# Altium PCB PCB1.PcbDoc (part 4 of 4)
Units mil, origin at the board's own origin, x right, y up, seen from the top; angles counter-clockwise.
Board outline 6796.85 x 4400 mil, 4 copper layers (Top Layer, Layer 1, Layer 2, Bottom Layer), stack 23.756 mil thick; 175 components, 152 nets, 720 pads, 183 vias.
Unrouted connection lines stored in the file: 10.
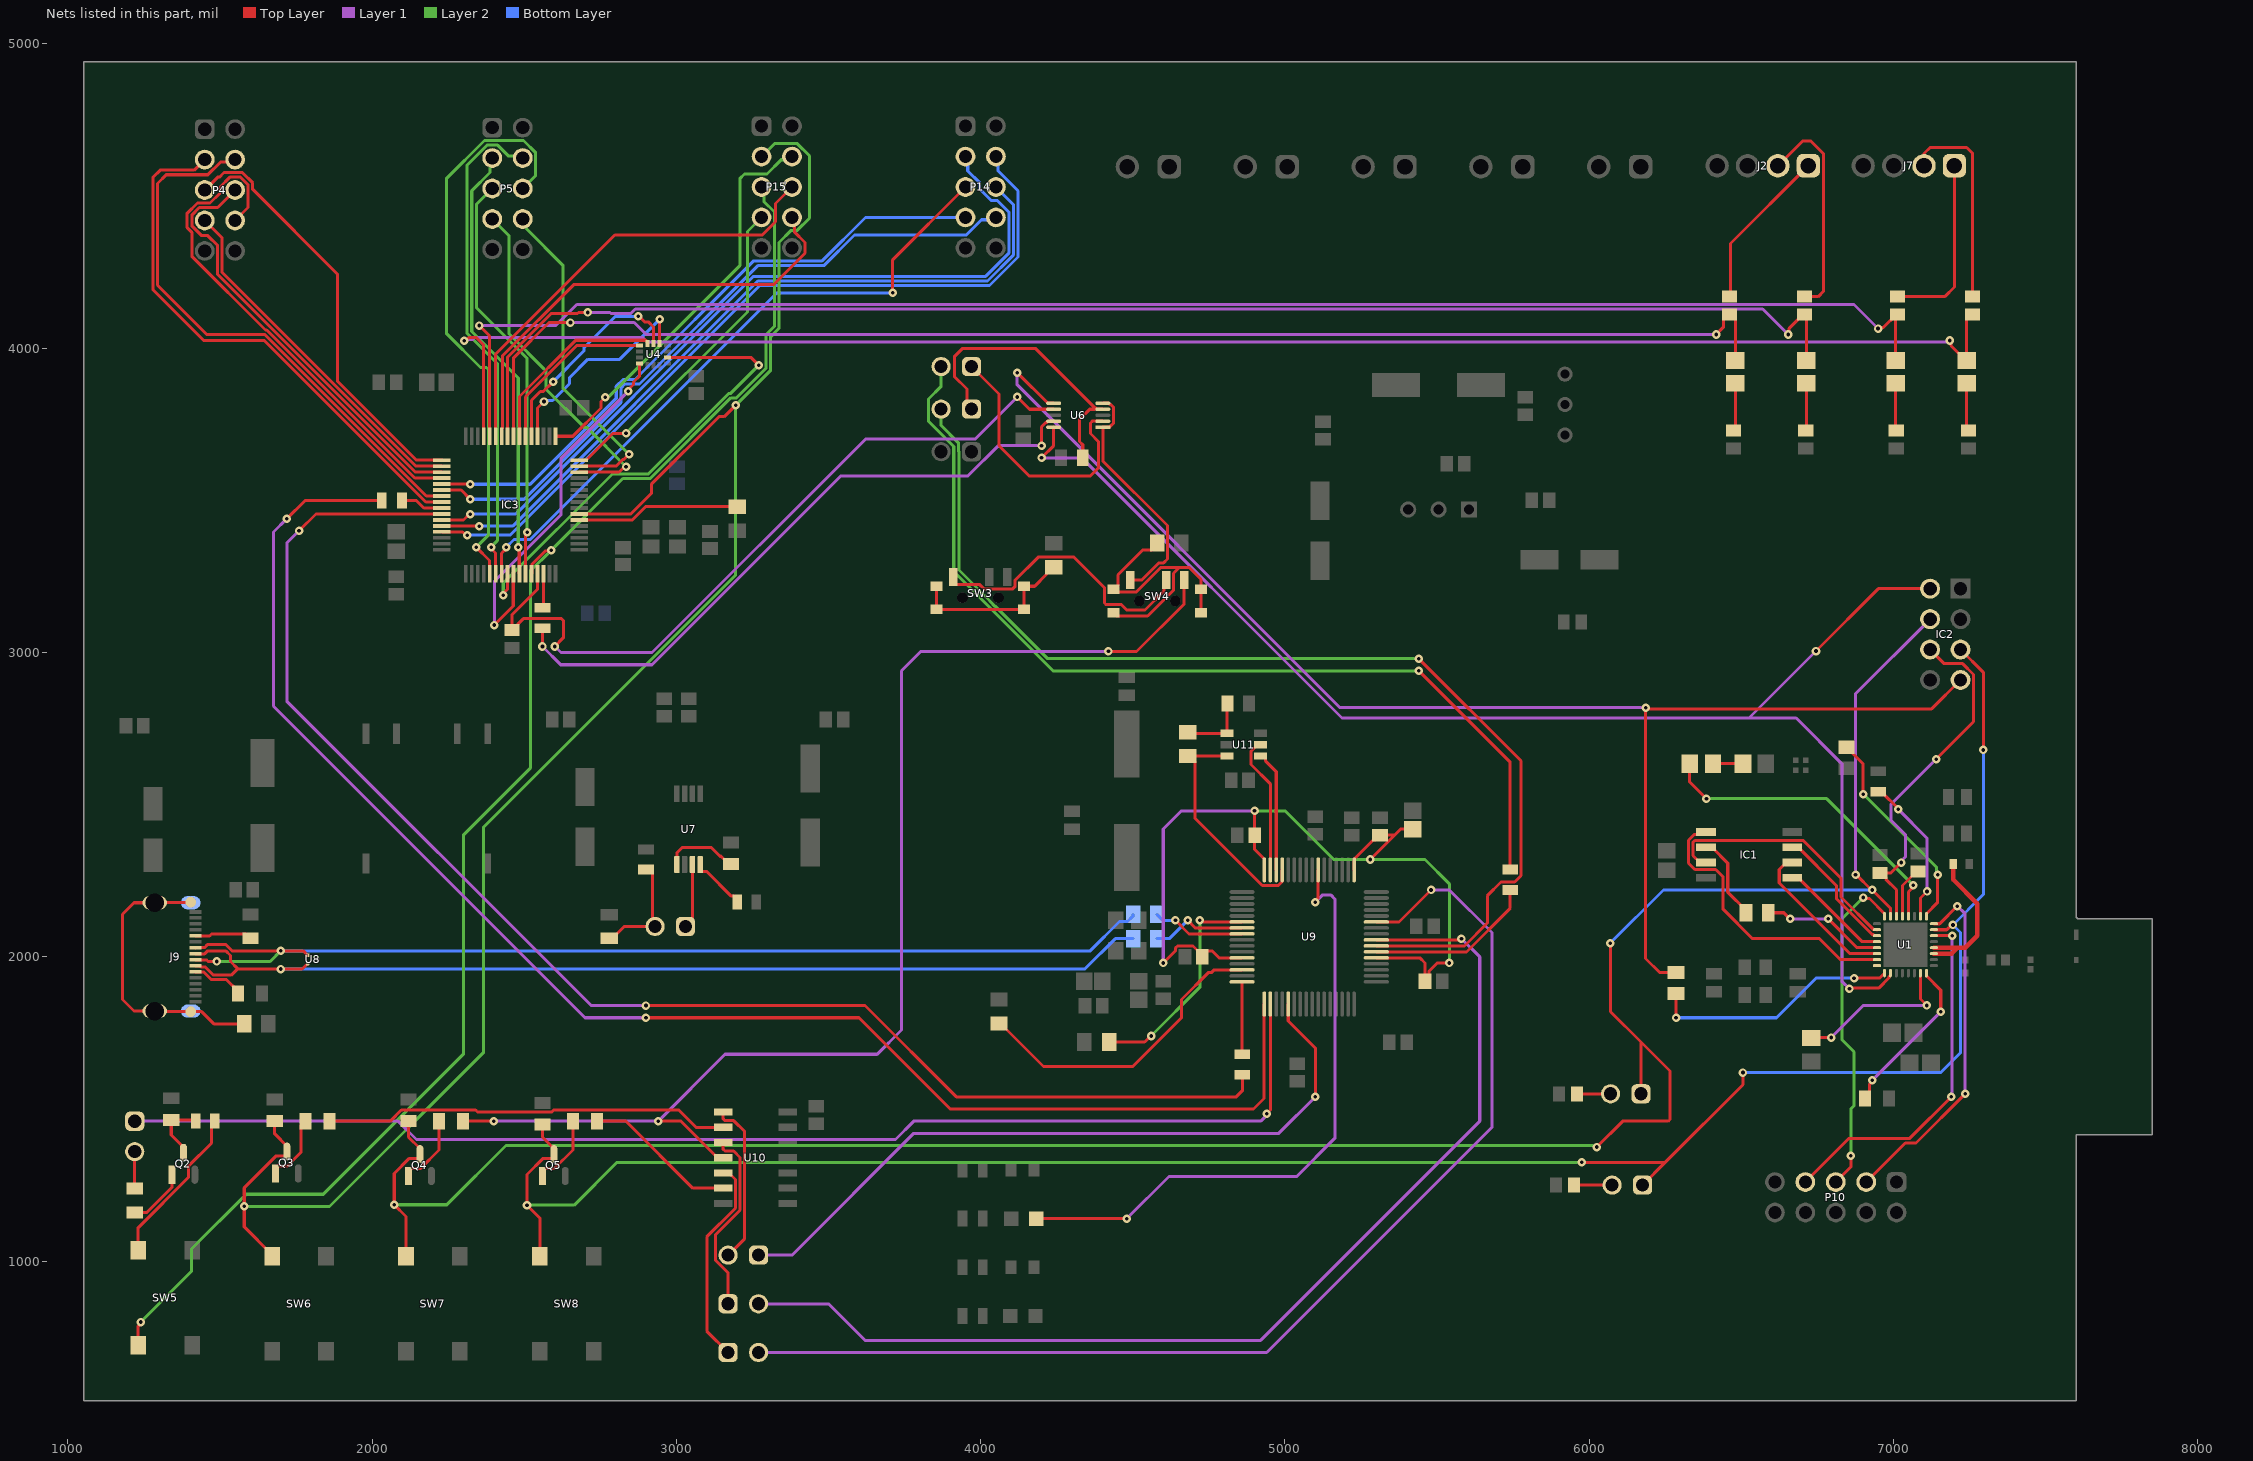
[diagram p5: the nets of this part, all layers, seen from the top]

## Via types
v1: diameter 28, hole 12, Top Layer to Bottom Layer, 170 vias
v2: diameter 19.68, hole 7.87, Top Layer to Bottom Layer, 9 vias
v3: diameter 240, hole 130, Top Layer to Bottom Layer, 4 vias

## Nets (pads, with @x,y where several pads share a name; then routed paths per layer and width w, separated by ;. In a path a pad name is that pad's centre, name@x,y a point inside that pad or via, vN(x,y) a via of type N, cw(c..) or ccw(c..) an arc to the next point about the centre after c; other vN are vias at no path point) (continued)
NetDS2_2: DS2.2 U9.55 | length 2066.2
  Top Layer w10: DS2.2@4182.68,1140 v1(4480,1140) ; v1(5100,2180) 5100,2184.87 5109.13,2194 U9.55@5109.13,2286.06
  Layer 1 w10: v1(4480,1140) 4618.62,1278.62 5038.62,1278.62 5164,1404 5164,2189.94 5149.94,2204 5124,2204 v1(5100,2180)
NetIC1_1: IC1.1 U1.20 | length 365.8
  Top Layer w10: IC1.1@6666.73,2260 6686.42,2260 6896.57,2049.84 U1.20@6945.5,2049.84
NetIC1_2: IC1.2 U1.22 | length 513.7
  Top Layer w10: IC1.2@6666.73,2310 6647.05,2310 6624.25,2287.2 6624.25,2243.06 6856.84,2010.47 U1.22@6945.5,2010.47
NetIC1_3: IC1.3 U1.19 | length 415.6
  Top Layer w10: IC1.3@6666.73,2360 6686.42,2360 6812.33,2234.08 6812.33,2190.89 6928.93,2074.29 6932.03,2074.29 U1.19@6936.72,2069.61
NetIC1_5: IC1.5 U1.23 | length 956.9
  Top Layer w10: IC1.5@6383.27,2410 6375.47,2402.2 6344.84,2402.2 6325.79,2383.15 6325.79,2308.06 6346.65,2287.2 6415.48,2287.2 6440.04,2262.65 6440.04,2156.61 6536.65,2060 6756.21,2060 6825.42,1990.79 U1.23@6945.5,1990.79
NetIC1_6: IC1.6 R2.1 | length 281.1
  Top Layer w10: IC1.6@6383.27,2360 6402.95,2360 6455.04,2307.91 6455.04,2212.83 6515,2152.87 R2.1@6515,2145
NetIC1_7: IC1.7 U1.18 | length 861
  Top Layer w10: IC1.7@6383.27,2310 6363.58,2310 6340.79,2332.79 6340.79,2376.94 6346.65,2382.79 6703.35,2382.79 6827.33,2258.81 6827.33,2197.1 6935.14,2089.29 6945.42,2089.29 U1.18@6945.5,2089.21
NetIC2_3: IC2.3 P2.1 Q5.3 R60.1 SW8.3 U1.7 | length 7043.9
  Top Layer w10: SW8.3@2551.42,1016.5 2551.42,1141.99 v1(2509.12,1184.28) 2509.12,1284.65 2562.52,1338.04 2591.51,1338.04 2597.4,1343.93 Q5.3@2597.4,1351.67 2597.4,1370.3 2560,1407.7 R60.1@2560,1449.13 ; v1(5975,1325) 6250,1325 ; P2.1@6175,1249.98 6250.01,1324.99 ; v1(6505,1620) 6505,1579.98 6250.01,1324.99 ; U1.7@7132.5,2089.21 7174.34,2089.21 7190.13,2105 v1(7195,2105) ; IC2.3@7220,3010 7295,2935 v1(7295,2680)
  Layer 2 w10: v1(2509.12,1184.28) 2664.28,1184.28 2805,1325 v1(5975,1325)
  Bottom Layer w10: v1(6505,1620) 7155,1620 7220,1685 7220,2080 v1(7195,2105) 7295,2205 v1(7295,2680)
NetIC2_4: IC2.4 R1.1 U6.6 | length 4723.6
  Top Layer w10: v1(4120,3920) 4120.39,3920 4221.02,3819.37 U6.6@4240,3819.37 ; v1@6185,2815 7125,2815 IC2.4@7220,2910 ; v1(6185,2819) 6185,1995 6231.1,1948.9 R1.1@6285,1948.9
  Layer 1 w10: v1(4120,3920) 4120,3880 5181,2819 v1(6185,2819)
NetIC2_5: IC2.5 U1.26 U6.10 | length 4847
  Top Layer w10: v1(4200,3640) 4240,3680 U6.10@4240,3740.63 ; v1(6745,3005) 6950,3210 IC2.5@7120,3210 ; v1(6855,1895) 6857.22,1897.22 6950.78,1897.22 6985.02,1931.46 6985.02,1935.02 6989.79,1939.79 U1.26@6989.79,1946.5
  Layer 1 w10: v1(4200,3640) 4332.44,3640 5187.44,2785 6525,2785 ; v1(6745,3005) 6525,2785 ; v1(6855,1895) 6830,1920 6830,2635 6680,2785 6525,2785
NetIC2_6: IC2.6 P3.1 Q4.3 R57.1 SW7.3 U1.15 | length 7729.7
  Top Layer w10: SW7.3@2111.42,1016.5 2111.42,1146.79 v1(2072.8,1185.4) 2072.8,1288.32 2122.52,1338.04 2151.51,1338.04 2157.4,1343.93 Q4.3@2157.4,1351.67 2157.4,1370.3 2120,1407.7 R57.1@2120,1460 ; v1(6025,1375) 6110,1460 6259.14,1460 6265,1465.86 6265,1625 6170,1720 ; v1(6069.14,2045.31) 6070,2044.44 6070,1820 6170,1720 ; P3.1@6170,1550 6170,1720 ; v1(6875,2270) 6877.5,2270 6927.5,2220 v1(6930,2220) 6989.79,2160.21 U1.15@6989.79,2133.5
  Layer 1 w10: v1(6875,2270) 6875,2865 IC2.6@7120,3110
  Layer 2 w10: v1(2072.8,1185.4) 2245.4,1185.4 2440,1380 v1@6025,1380
  Bottom Layer w10: v1(6069.14,2045.31) 6243.83,2220 v1(6930,2220)
NetIC2_7: IC2.7 R4.1 U1.14 | length 1179.3
  Top Layer w10: R4.1@6955,2275 6990,2275 v1(7025,2310) ; R4.1@6959.92,2275 6974.61,2260.31 6974.61,2255.39 7009.47,2220.53 U1.14@7009.47,2133.5 ; IC2.7@7120,3010 7166.46,2963.54 7226.95,2963.54 7262.78,2927.72 7262.78,2772.78 v1(7140,2650)
  Layer 1 w10: v1(7025,2310) 7025,2314.87 7039,2328.87 7039,2401.59 6991,2449.59 6991,2501 v1(7140,2650)
NetIC3_6: IC3.6 R62.2 | length 537.1
  Top Layer w10: IC3.6@2680.91,3435.79 2855.08,3435.79 2898.66,3479.37 R62.2@3200,3479.37
NetIC3_7: IC3.7 P15.3 Q3.3 R49.1 SW6.3 | length 5842
  Top Layer w10: SW6.3@1671.42,1016.5 1671.42,1021.42 1580,1112.84 v1(1580,1180) 1580,1241.26 1685.11,1346.37 1714.11,1346.37 1720,1352.27 Q3.3@1720,1360 1720,1378.63 1680,1418.63 R49.1@1680,1460 ; IC3.7@2680.91,3455.47 2850.12,3455.47 2917.7,3523.05 2917.7,3553.05 3139.76,3775.11 3157.08,3775.11 v1(3194.92,3812.96)
  Layer 2 w10: v1(1580,1180) 1860,1180 2366.52,1686.52 2366.52,2426.52 3194.92,3254.92 v1(3194.92,3812.96) 3309.69,3927.73 3309.69,4038.03 3337.48,4065.83 3337.48,4347.56 3377.42,4387.5 3397.58,4387.5 3437.48,4427.4 3437.48,4632.6 3397.6,4672.48 3322.48,4672.48 P15.3@3280,4630
NetIC3_14: IC3.14 P5.7 | length 1162.3
  Top Layer w10: IC3.14@2680.91,3593.27 2812.05,3593.27 2829.77,3610.99 v1(2834.65,3610.99)
  Layer 2 w10: P5.7@2395,4425 2449.92,4370.08 2449.92,4047.67 2571,3926.59 2571,3866.01 2696.79,3740.22 2705.42,3740.22 v1(2834.65,3610.99)
NetIC3_15: IC3.15 P5.8 | length 1097.8
  Top Layer w10: IC3.15@2680.91,3612.95 2802.66,3612.95 2824.7,3634.99 2827.91,3634.99 v1(2844.49,3651.57)
  Layer 2 w10: P5.8@2495,4425 2505.52,4414.48 2505.52,4394.09 2627.95,4271.65 2627.95,3868.11 v1(2844.49,3651.57)
NetIC3_16: IC3.16 P15.7 | length 1084.1
  Top Layer w10: IC3.16@2680.91,3632.64 2704.04,3632.64 2791.87,3720.47 v1(2834.65,3720.47)
  Layer 2 w10: v1(2834.65,3720.47) 3233.5,4119.33 3233.5,4383.5 P15.7@3280,4430
NetIC3_17: IC3.17 P15.4 | length 1338
  Top Layer w10: IC3.17@2602.64,3710.91 2659.85,3710.91 2752.46,3803.52 2752.46,3825.3 v1(2765.75,3838.58)
  Layer 2 w10: v1(2765.75,3838.58) 2769.19,3842.03 2779.03,3842.03 3208.66,4271.65 3208.66,4557.09 3224.06,4572.48 3297.6,4572.48 3344.6,4619.48 3369.48,4619.48 P15.4@3380,4630
NetIC3_20: IC3.20 U4.12 | length 705.7
  Top Layer w10: IC3.20@2543.58,3710.91 2543.58,3803.58 v1(2565,3825) ; U4.12@2944.69,4015.93 2944.69,4094.69 v1(2945,4095)
  Bottom Layer w10: v1(2565,3825) 2568.44,3828.44 2593.44,3828.44 2648.64,3883.64 2648.64,3903.64 2708.83,3963.83 2813.83,3963.83 v1(2945,4095)
NetIC3_21: IC3.21 U4.13 | length 707.9
  Top Layer w10: IC3.21@2523.9,3710.91 2523.9,3828.9 2552.73,3857.73 2562.73,3857.73 v1(2595,3890) ; v1(2875,4105) 2877.57,4105 2896.79,4085.78 2909.22,4085.78 2925,4070 U4.13@2925,4015.93
  Bottom Layer w10: v1(2595,3890) 2696.72,3991.72 2696.72,4001.72 2800,4105 v1(2875,4105)
NetIC3_22: IC3.22 U4.1 | length 574.5
  Top Layer w10: IC3.22@2504.21,3710.91 2504.21,3840.32 2673.42,4009.53 U4.1@2879.23,4009.53
NetIC3_23: IC3.23 U4.14 | length 635.1
  Top Layer w10: IC3.23@2484.53,3710.91 2484.53,3841.85 2669.09,4026.42 2899.25,4026.42 2905.32,4020.36 U4.14@2905.32,4015.93
NetIC3_24: IC3.24 R16.1 R18.2 | length 4531
  Top Layer w10: IC3.24@2464.84,3710.91 2464.84,3969.22 2465.77,3969.22 2581.2,4084.65 v1(2651.95,4084.65) ; v1(6417.32,4045.28) 6440.71,4068.66 6440.71,4095.79 6455.39,4110.47 R16.1@6460.32,4110.47 6480,4110.47 R18.2@6480,3960
  Layer 1 w10: v1(2651.95,4084.65) 2861.41,4084.65 2900.78,4045.28 v1(6417.32,4045.28)
NetIC3_25: IC3.25 R17.1 R19.2 | length 4818.5
  Top Layer w10: IC3.25@2445.16,3710.91 2445.16,3970.75 2588.58,4114.17 2675.14,4114.17 2678.66,4117.7 v1(2709.14,4117.7) ; v1(6653.54,4045.28) 6656.99,4048.72 6656.99,4065.61 6701.85,4110.47 R17.1@6706.77,4110.47 6713.33,4110.47 R19.2@6713.33,3960
  Layer 1 w10: v1(2709.14,4117.7) 2782.08,4117.7 2785.6,4114.17 2850.23,4114.17 2865.06,4129 6569.82,4129 v1(6653.54,4045.28)
NetIC3_26: IC3.26 P15.8 | length 1534.5
  Top Layer w10: IC3.26@2425.47,3710.91 2425.47,3734.04 2429.25,3737.82 2429.25,3976.06 2662.33,4209.13 3319.21,4209.13 3422.48,4312.4 3422.48,4347.6 3387.56,4382.52 3387.56,4422.44 P15.8@3380,4430
NetIC3_27: IC3.27 P15.6 | length 1506.7
  Top Layer w10: IC3.27@2405.79,3710.91 2405.79,3980.59 2797.68,4372.48 3282.56,4372.48 3326.02,4415.94 3326.02,4476.02 P15.6@3380,4530
NetIC3_28: IC3.28 R22.1 R24.2 | length 5276
  Top Layer w10: v1(2352.36,4074.8) 2386.1,4041.06 IC3.28@2386.1,3710.91 ; v1(6948.82,4064.96) 6952.26,4068.4 6966.24,4068.4 7008.31,4110.47 R22.1@7013.23,4110.47 7006.67,4110.47 R24.2@7006.67,3960
  Layer 1 w10: v1(2352.36,4074.8) 2603.85,4074.8 2673.05,4144 6869.78,4144 v1(6948.82,4064.96)
NetIC3_29: IC3.29 R23.1 R25.2 | length 5533.9
  Top Layer w10: v1(2302.39,4024.83) 2307.26,4024.83 2317.86,4035.43 2342.52,4035.43 2366.42,4011.53 IC3.29@2366.42,3710.91 ; v1(7185.04,4025.59) 7188.48,4022.15 7188.48,4008.56 7237.05,3960 R25.2@7240,3960 7240,4110.47 R23.1@7259.68,4110.47
  Layer 1 w10: v1(2302.39,4024.83) 2305.83,4028.27 2329.22,4028.27 2336.39,4035.43 2889.41,4035.43 2903.57,4021.28 7175.85,4021.28 7180.17,4025.59 v1(7185.04,4025.59)
NetIC3_33: IC3.33 P4.5 | length 1413.2
  Top Layer w10: P4.5@1450,4520 1492.48,4562.48 1498.4,4562.48 1513.4,4577.48 1573.81,4577.48 1607.48,4543.81 1607.48,4522.6 1886.33,4243.75 1886.33,3891.23 2144.32,3633.23 2228.5,3633.23 IC3.33@2229.09,3632.64
NetIC3_34: IC3.34 P4.7 | length 1180
  Top Layer w10: P4.7@1450,4420 1507.52,4362.48 1507.52,4248.83 2143.39,3612.95 IC3.34@2229.09,3612.95
NetIC3_35: IC3.35 P4.6 | length 1424.2
  Top Layer w10: P4.6@1550,4520 1492.48,4462.48 1432.4,4462.48 1407.52,4437.6 1407.52,4402.4 1439.94,4369.98 1460.1,4369.98 1492.52,4337.56 1492.52,4242.61 2141.86,3593.27 IC3.35@2229.09,3593.27
NetIC3_36: IC3.36 P4.8 | length 1677.5
  Top Layer w10: P4.8@1550,4420 1592.48,4462.48 1592.48,4537.6 1567.6,4562.48 1532.4,4562.48 1499.98,4530.06 1499.98,4509.9 1467.56,4477.48 1426.19,4477.48 1392.52,4443.81 1392.52,4396.19 1407.52,4381.19 1407.52,4302.4 1649.65,4060.28 1653.64,4060.28 2140.34,3573.58 IC3.36@2229.09,3573.58
NetIC3_37: IC3.37 P14.7 | length 2107.2
  Top Layer w10: IC3.37@2229.09,3553.9 2229.47,3553.52 2322.46,3553.52 v1(2322.83,3553.15)
  Bottom Layer w10: v1(2322.83,3553.15) 2519.68,3553.15 2802.36,3835.83 2802.36,3874.79 2825.21,3897.64 2864.17,3897.64 3254.06,4287.52 3478.91,4287.52 3621.39,4430 P14.7@3950,4430
NetIC3_38: IC3.38 P14.8 | length 2244.7
  Top Layer w10: IC3.38@2229.09,3534.21 2292.56,3534.21 v1(2322.83,3503.94)
  Bottom Layer w10: v1(2322.83,3503.94) 2500,3503.94 2817.36,3821.3 2817.36,3868.58 2831.42,3882.64 2878.7,3882.64 3267.72,4271.65 3484.25,4271.65 3585.08,4372.48 3952.56,4372.48 4002.52,4422.44 4042.44,4422.44 P14.8@4050,4430
NetIC3_39: IC3.39 P4.4 | length 1843.6
  Top Layer w10: P4.4@1550,4620 1542.44,4612.44 1502.52,4612.44 1460.35,4570.28 1323.42,4570.28 1294.53,4541.39 1294.53,4207.44 1456.69,4045.28 1647.43,4045.28 2178.18,3514.53 IC3.39@2229.09,3514.53
NetIC3_40: IC3.40 P4.3 | length 1801.8
  Top Layer w10: P4.3@1450,4620 1415.28,4585.28 1303.73,4585.28 1279.53,4561.07 1279.53,4192.91 1446.85,4025.59 1645.9,4025.59 2176.65,3494.84 IC3.40@2229.09,3494.84
NetIC3_41: IC3.41 R29.1 | length 140.9
  Top Layer w10: R29.1@2098.5,3500 2145.25,3500 2170.09,3475.16 IC3.41@2229.09,3475.16
NetIC3_42: IC3.42 R48.2 | length 4808.4
  Top Layer w10: v1(1760,3400) 1815.47,3455.47 IC3.42@2229.09,3455.47 ; v1(2900,1840) 3620,1840 3920,1540 4840,1540 4860,1560 R48.2@4860,1613
  Layer 1 w10: v1(1760,3400) 1720,3360 1720,2840 2720,1840 v1(2900,1840)
NetIC3_43: IC3.43 P14.3 | length 2614.9
  Top Layer w10: IC3.43@2229.09,3435.79 2300.76,3435.79 2319.7,3454.72 v1(2322.83,3454.72)
  Bottom Layer w10: v1(2322.83,3454.72) 2472,3454.72 3253.54,4236.27 4016.34,4236.27 4092.48,4312.4 4092.48,4447.6 4054.55,4485.53 4034.39,4485.53 3996.46,4523.46 3996.46,4543.62 3957.56,4582.52 3957.56,4622.44 P14.3@3950,4630
NetIC3_44: IC3.44 P14.6 | length 2495.3
  Top Layer w10: IC3.44@2229.09,3416.1 2229.47,3415.73 2351.99,3415.73 v1(2352.36,3415.35)
  Bottom Layer w10: v1(2352.36,3415.35) 2461.8,3415.35 3267.72,4221.27 4022.56,4221.27 4107.48,4306.19 4107.48,4472.52 P14.6@4050,4530
NetIC3_45: IC3.45 P14.4 | length 2636.5
  Top Layer w10: IC3.45@2229.09,3396.42 2297.53,3396.42 2308.12,3385.83 v1(2312.99,3385.83)
  Bottom Layer w10: v1(2312.99,3385.83) 2453.49,3385.83 3273.93,4206.27 4028.77,4206.27 4122.48,4299.98 4122.48,4517.6 4057.56,4582.52 4057.56,4622.44 P14.4@4050,4630
NetIC3_53: IC3.53 P5.6 | length 1898
  Top Layer w10: v1(2342.52,3346.46) 2386.1,3302.87 IC3.53@2386.1,3259.09
  Layer 2 w10: v1(2342.52,3346.46) 2381.89,3385.83 2381.89,3931.15 2376.03,3937.01 2356.26,3937.01 2244.09,4049.18 2244.09,4557.09 2369.49,4682.48 2497.6,4682.48 2537.48,4642.6 2537.48,4567.48 P5.6@2495,4525
NetIC3_54: IC3.54 P5.4 | length 1625.4
  Top Layer w10: v1(2391.73,3346.46) 2391.73,3341.59 2405.79,3327.53 IC3.54@2405.79,3259.09
  Layer 2 w10: v1(2391.73,3346.46) 2391.73,3348.1 2411.42,3367.78 2411.42,3949.74 2312.52,4048.63 2312.52,4602.6 2377.4,4667.48 2412.6,4667.48 2447.52,4632.56 2487.44,4632.56 P5.4@2495,4625
NetIC3_55: IC3.55 P14.5 | length 2156.5
  Top Layer w10: IC3.55@2425.47,3259.09 2425.47,3326.11 2440.94,3341.59 v1(2440.94,3346.46) ; v1(3710.63,4182.27) 3710.63,4290.63 P14.5@3950,4530
  Bottom Layer w10: v1(2440.94,3346.46) 2466.16,3371.67 2519.78,3371.67 3330.38,4182.27 v1(3710.63,4182.27)
NetIC3_56: IC3.56 U4.9 | length 1562.1
  Top Layer w10: v1(2431.1,3188.98) 2431.1,3193.85 2445.16,3207.9 IC3.56@2445.16,3259.09 ; U4.9@2970.77,3970.16 3244.41,3970.16 v1(3270.69,3943.88)
  Layer 2 w10: v1(2431.1,3188.98) 2431.1,3228.35 2789.75,3586.99 2907.86,3586.99 3172.82,3851.96 3178.76,3851.96 v1(3270.69,3943.88)
NetIC3_57: IC3.57 U4.4 | length 1252.5
  Top Layer w10: v1(2401.57,3090.55) 2463.98,3152.96 2463.98,3258.23 IC3.57@2464.84,3259.09 ; v1(2841.36,3858.64) 2841.36,3863.51 2859.04,3881.18 2859.04,3889.04 2879.23,3909.23 U4.4@2879.23,3950.47
  Layer 1 w10: v1(2401.57,3090.55) 2401.57,3233.78 2621.47,3453.67 2621.47,3638.74 v1(2841.36,3858.64)
NetIC3_58: IC3.58 P5.3 | length 1458.9
  Top Layer w10: v1(2480.32,3346.46) 2483.62,3343.15 2483.62,3260 IC3.58@2484.53,3259.09
  Layer 2 w10: P5.3@2395,4625 2387.44,4617.44 2387.44,4577.52 2327.52,4517.6 2327.52,4054.85 2480.32,3902.05 v1(2480.32,3346.46)
NetIC3_59: IC3.59 P5.5 | length 1359.3
  Top Layer w10: IC3.59@2504.21,3259.09 2504.32,3259.2 2504.32,3385.27 2509.84,3390.8 v1(2509.84,3395.67)
  Layer 2 w10: P5.5@2395,4525 2342.52,4472.52 2342.52,4133.86 2509.84,3966.54 v1(2509.84,3395.67)
NetIC3_60: IC3.60 P15.5 SW5.4 | length 5016.7
  Top Layer w10: SW5.4@1231.42,723.5 1231.42,786.55 1240,795.13 v1(1240,800) ; IC3.60@2523.9,3259.09 2524.8,3260 2524.8,3289.4 2568.57,3333.17 2585.14,3333.17 v1(2588.58,3336.61)
  Layer 2 w10: v1(1240,800) 1406.75,966.75 1406.75,1040.69 1586.06,1220 1840,1220 2300,1680 2300,2400 2520,2620 2520,3268.03 v1(2588.58,3336.61) 2823.96,3571.99 2914.07,3571.99 3179.04,3836.96 3197.7,3836.96 3294.69,3933.94 3294.69,4044.25 3322.48,4072.04 3322.48,4447.6 3287.56,4482.52 3287.56,4522.44 P15.5@3280,4530
NetIC3_61: IC3.61 R30.1 U6.7 | length 2515.8
  Top Layer w10: IC3.61@2543.58,3259.09 2543.58,3207.85 2460,3124.27 R30.1@2460,3074.53 2497.02,3111.54 2622.6,3111.54 2628.46,3105.69 2628.46,3048.46 v1(2600,3020) ; v1(4120,3840) 4160.31,3799.69 U6.7@4240,3799.69
  Layer 1 w10: v1(2600,3020) 2601.01,3020 2621.01,3000 2920,3000 3621.5,3701.5 3981.5,3701.5 v1(4120,3840)
NetIC3_62: IC3.62 R28.1 | length 106.9
  Top Layer w10: R28.1@2560,3153.5 2563.27,3156.77 IC3.62@2563.27,3259.09
NetJ2_1: J2.1 R16.2 | length 540.2
  Top Layer w10: R16.2@6460.32,4169.53 6464,4169.53 6464,4344 J2.1@6720,4600
NetJ2_2: J2.2 R17.2 | length 722.3
  Top Layer w10: J2.2@6620,4600 6701,4681 6728,4681 6769,4640 6769,4186.53 6752,4169.53 R17.2@6706.77,4169.53
NetJ7_1: J7.1 R22.2 | length 598.5
  Top Layer w10: R22.2@7013.23,4169.53 7168,4169.53 7200,4201.53 J7.1@7200,4600
NetJ7_2: J7.2 R23.2 | length 687.4
  Top Layer w10: J7.2@7100,4600 7100,4640 7120,4660 7240,4660 7260,4640 7260,4169.53 R23.2@7259.68,4169.53
NetJ9_1: J9.1 J9.2 J9.3 J9.4 R47.1 | length 953.3
  Top Layer w10: J9.1@1404.02,2178.94 1286.89,2178.94 J9.3@1285.91,2177.95 1217.95,2177.95 1180,2140 1180,1860 1217.95,1822.05 J9.4@1285.91,1822.05 1286.89,1821.06 1403.03,1821.06 J9.2@1404.02,1820.08 1439.92,1820.08 1480,1780 R47.1@1580,1780
NetJ9_A5: J9.A5 R39.2 | length 188.5
  Top Layer w10: J9.A5@1419.76,2068.9 1466.47,2068.9 1472.57,2075 1586.26,2075 R39.2@1600,2061.26
NetJ9_A6: J9.A6 J9.B6 R52.1 U8.1 | length 3537.6
  Top Layer w10: J9.B6@1419.76,1990.16 1456.05,1990.16 1461.05,1985.16 1489.97,1985.16 v1(1490.05,1985.08) ; J9.A6@1419.76,2029.53 1420.67,2030.43 1449.22,2030.43 1458.79,2040 1520,2040 1540,2020 v1(1700,2020) 1773.59,2020 U8.1@1788.1,2005.48
  Layer 2 w10: v1(1490.05,1985.08) 1665.08,1985.08 v1(1700,2020)
  Bottom Layer w10: v1(1700,2020) 4360,2020 4456.46,2116.46 4482.64,2116.46 4501.26,2135.08 R52.1@4501.26,2140
NetJ9_A7: J9.A7 J9.B7 R51.1 U8.2 | length 3418.7
  Top Layer w10: J9.A7@1419.76,1970.47 1433.54,1970.47 1437.32,1966.69 1452.08,1966.69 1478.77,1940 1537.05,1940 1558.27,1961.22 ; J9.B7@1419.76,2009.84 1449.84,2009.84 1460,2020 1518.79,2020 1534.51,2004.28 1534.51,1984.98 1558.27,1961.22 ; U8.2@1788.1,1977.92 1770.18,1960 v1(1700,1960) 1559.49,1960 1558.27,1961.22
  Bottom Layer w10: v1(1700,1960) 4342.47,1960 4442.47,2060 R51.1@4501.26,2060
NetJ9_B5: J9.B5 R43.2 | length 173.6
  Top Layer w10: J9.B5@1419.76,1950.79 1420.67,1949.88 1447.67,1949.88 1472.56,1925 1521.89,1925 1560,1886.89 R43.2@1560,1880
NetL1_2: L1.2 U1.3 U1.4 | length 516.7
  Top Layer w10: L1.2@7196.71,2300.57 L1.2@7196.71,2305
  Top Layer w15: U1.3@7132.5,2010.47 7190.47,2010.47 7210.16,2030.16 ; U1.4@7132.5,2030.16 7210.16,2030.16 ; L1.2@7196.71,2305 7196.71,2253.29 7275,2175 7275,2070 7235.16,2030.16 7210.16,2030.16
NetP1_1: P1.1 U6.2 | length 877.3
  Top Layer w10: P1.1@3970,3940 4060,3850 4060,3680 4159,3581 4361,3581 4386.48,3606.48 4386.48,3693.92 4360.61,3719.8 4360.61,3754.46 4366.46,3760.32 U6.2@4401.48,3760.32
NetP1_2: P1.2 R54.2 | length 3164.1
  Top Layer w10: v1(5440,2940) 5740,2640 R54.2@5740,2287
  Layer 2 w10: P1.2@3870,3940 3870,3874.98 3828.5,3833.49 3828.5,3760.18 3911.5,3677.19 3911.5,3266.21 4237.7,2940 v1@5437.85,2940
NetP2_2: P2.2 R6.1 | length 125
  Top Layer w10: R6.1@5950,1250 P2.2@6075,1249.98
NetP3_2: P3.2 R7.1 | length 110.5
  Top Layer w10: R7.1@5959.53,1550 P3.2@6070,1550
NetP6_1: P6.1 R31.1 U6.4 | length 973.9
  Top Layer w10: P6.1@3970,3800 3955,3815 3955,3865.88 3913.5,3907.37 3913.5,3972.63 3940.88,4000 4179.43,4000 4376.21,3803.22 4378.74,3803.22 4382.28,3799.69 U6.4@4401.48,3799.69 ; R31.1@4335.43,3640 4335.43,3683.35 4325,3693.79 4325,3766.21 4358.47,3799.69 4376.21,3799.69
NetP6_2: P6.2 U9.39 | length 3661.6
  Top Layer w10: U9.39@5300.08,2036.06 5463.11,2036.06 5463.18,2036 5589.94,2036 5665,2111.06 5665,2200.77 5710.11,2245.88 5754.65,2245.88 5775.75,2266.98 5775.75,2644.25 v1(5440,2980)
  Layer 2 w10: P6.2@3870,3800 3870,3746.21 3926.5,3689.72 3926.5,3662.19 3928.5,3660.18 3928.5,3271.5 4030.4,3169.6 4030.4,3168.52 4046.63,3152.28 4047.72,3152.28 4220,2980 v1(5440,2980)
NetP8_1: P8.1 U9.18 | length 4147.9
  Top Layer w10: v1(4940,1484.87) 4951.65,1496.52 U9.18@4951.65,1845.12
  Layer 1 w10: P8.1@1220,1460 2085.81,1460 2145.81,1400 3720,1400 3780,1460 4920,1460 4940,1480 v1(4940,1484.87)
NetP8_2: P8.2 R46.1 | length 120.6
  Top Layer w10: R46.1@1220,1239.37 P8.2@1220,1360
NetP9_1: P9.1 U7.3 | length 212.9
  Top Layer w10: P9.1@3030,2100 3030,2105.82 3052.8,2128.61 U7.3@3052.8,2303.5
NetP9_2: P9.2 R37.1 R42.2 | length 371.6
  Top Layer w10: R42.2@2780,2061.61 2789.84,2061.61 2828.23,2100 P9.2@2930,2100 2921.57,2108.43 2921.57,2275.79 2909.84,2287.52 R37.1@2900,2287.52
NetP10_3: P10.3 U1.8 | length 1173.6
  Top Layer w10: P10.3@6910,1260 7038.54,1388.54 7073.54,1388.54 v1(7235,1550) ; U1.8@7132.5,2108.9 7151.53,2108.9 v1(7209.54,2166.91)
  Layer 1 w10: v1(7209.54,2166.91) 7235,2141.45 v1(7235,1550)
NetP10_5: P10.5 U1.16 | length 1105.3
  Top Layer w10: P10.5@6810,1260 6859.58,1309.57 v1(6859.58,1346.41) ; v1(6900,2195) 6903.44,2191.56 6920.75,2191.56 6970.1,2142.21 U1.16@6970.1,2133.5
  Layer 2 w10: v1(6859.58,1346.41) 6859.58,1499.9 6870,1510.32 6870,1688.13 6831,1727.13 6831,2126 v1(6900,2195)
NetP10_7: P10.7 U1.6 | length 1187.2
  Top Layer w10: P10.7@6710,1260 6853.54,1403.54 7053.54,1403.54 v1(7190,1540) ; U1.6@7132.5,2069.53 7132.58,2069.61 7192.27,2069.61 v1(7192.59,2069.93)
  Layer 1 w10: v1(7190,1540) 7191.29,1541.29 7191.29,2068.64 v1(7192.59,2069.93)
NetP11_1: P11.1 U9.21 | length 2387.5
  Top Layer w10: U9.21@5010.71,1845.12 5010.71,1789.29 5100,1700 v1(5100,1540)
  Layer 1 w10: P11.1@3270,1020 3380,1020 3780,1420 4980,1420 v1(5100,1540)
NetP11_2: P11.2 U10.1 | length 538.3
  Top Layer w10: U10.1@3153.7,1490 3153.7,1468.11 3160,1461.81 3188.35,1461.81 3224.21,1425.95 3224.21,1074.21 P11.2@3170,1020
NetP12_1: P12.1 U10.3 | length 620.5
  Top Layer w10: U10.3@3153.7,1390 3153.7,1367.67 3159.56,1361.81 3188.35,1361.81 3209.21,1340.95 3209.21,1167.83 3128.5,1087.13 3128.5,1002.81 3170,961.32 P12.1@3170,860
NetP12_2: P12.2 U9.40 | length 3624.5
  Top Layer w10: U9.40@5300.08,2055.75 5570.88,2055.75 5575.13,2060 v1(5580,2060)
  Layer 1 w10: P12.2@3270,860 3500,860 3620,740 4920,740 5640,1460 5640,2000 v1(5580,2060)
NetP13_1: P13.1 U10.5 | length 685.9
  Top Layer w10: U10.5@3153.7,1290 3172.4,1290 3194.21,1268.19 3194.21,1174.05 3188.35,1168.19 3188.19,1168.19 3100,1080 3100,770 P13.1@3170,700
NetP13_2: P13.2 U9.43 | length 3838
  Top Layer w10: U9.43@5300.08,2114.8 5374.8,2114.8 v1(5480,2220)
  Layer 1 w10: P13.2@3270,700 4940,700 5680,1440 5680,2080 5540,2220 v1(5480,2220)
NetQ2_1: Q2.1 R46.2 | length 198.1
  Top Layer w10: R46.2@1220,1160.63 1260.63,1160.63 1342.6,1242.6 Q2.1@1342.6,1284.17
NetQ2_3: Q2.3 R44.1 R45.1 | length 207.2
  Top Layer w10: Q2.3@1380,1355.83 1380,1374.46 1340,1414.46 R44.1@1340,1464.57 1415.43,1464.57 R45.1@1420,1460
NetQ3_1: Q3.1 R50.2 | length 231.7
  Top Layer w10: Q3.1@1682.6,1288.33 1682.6,1306.96 1688.98,1313.34 1722.2,1313.34 1765.94,1357.08 1765.94,1445.32 R50.2@1780.63,1460
NetQ4_1: Q4.1 R58.2 | length 240.9
  Top Layer w10: Q4.1@2120,1280 2120,1298.63 2126.38,1305 2159.6,1305 2220,1365.41 R58.2@2220,1460
NetQ5_1: Q5.1 R61.2 | length 240.9
  Top Layer w10: Q5.1@2560,1280 2560,1298.63 2566.38,1305 2599.6,1305 2660,1365.41 R61.2@2660,1460
NetR1_2: R1.2 U1.25 | length 825.8
  Top Layer w10: v1(6285,1800) R1.2@6285,1880 ; v1(6870,1930) 6953.61,1930 U1.25@6970.1,1946.5
  Bottom Layer w10: v1(6285,1800) 6615,1800 6745,1930 v1(6870,1930)
NetR2_2: R2.2 U1.21 | length 405.2
  Top Layer w10: R2.2@6587.84,2145 6638.99,2145 6658.99,2125 v1(6660,2125) ; v1(6785,2125) 6879.84,2030.16 U1.21@6945.5,2030.16
  Layer 1 w10: v1(6660,2125) v1(6785,2125)
NetR3_2: R3.2 U1.13 | length 170.9
  Top Layer w10: U1.13@7029.16,2133.5 7029.16,2234.55 7075.08,2280.47 R3.2@7080,2280.47
NetR5_2: R5.2 U1.31 | length 538.6
  Top Layer w10: R5.2@6730,1733.39 6731.61,1735 v1(6795,1735) ; U1.31@7088.21,1946.5 7088.21,1861.79 7109.35,1840.64 v1(7109.35,1840.31)
  Layer 1 w10: v1(6795,1735) 6900,1840 7109.05,1840 v1(7109.35,1840.31)
NetR8_1: R8.1 U1.32 | length 534.3
  Top Layer w10: R8.1@6905.63,1535 6920.31,1549.69 6920.31,1580.44 6930,1590.13 v1(6930,1595) ; U1.32@7107.9,1946.5 7107.9,1937.8 7155,1890.69 v1(7155,1820)
  Layer 1 w10: v1(6930,1595) v1(7155,1820)
NetR9_2: R9.2 R10.1 | length 98.4
  Top Layer w10: R10.1@6406.77,2635 R9.2@6505.2,2635
NetR10_2: R10.2 U1.12 | length 1044
  Top Layer w10: R10.2@6330,2635 6330,2575 v1(6385,2520) ; U1.12@7048.84,2133.5 7048.84,2213.97 7065,2230.13 v1(7065,2235)
  Layer 2 w10: v1(6385,2520) 6780,2520 v1(7065,2235)
NetR12_2: R12.2 U1.10 | length 490.6
  Top Layer w10: R12.2@6950,2543 6959.88,2543 7015,2487.88 v1(7015,2485) ; U1.10@7088.21,2133.5 7088.21,2193.21 v1(7110,2215)
  Layer 1 w10: v1(7015,2485) 7110,2390 v1(7110,2215)
NetR13_2: R13.2 U1.9 | length 695.1
  Top Layer w10: R13.2@6845,2688.95 6900,2633.95 v1(6900,2535) ; U1.9@7107.9,2133.5 7107.9,2142.21 7145,2179.31 v1(7145,2270)
  Layer 2 w10: v1(6900,2535) 7141.56,2293.44 7141.56,2273.44 v1(7145,2270)
NetR18_1: R18.1 R20.2 | length 161.5
  Top Layer w10: R20.2@6474.09,3729.56 6480,3729.56 R18.1@6480,3885.2
NetR19_1: R19.1 R21.2 | length 157.6
  Top Layer w10: R21.2@6711.36,3729.56 6713.33,3729.56 R19.1@6713.33,3885.2
NetR24_1: R24.1 R26.2 | length 157.6
  Top Layer w10: R24.1@7006.67,3885.2 7006.67,3729.56 R26.2@7008.64,3729.56
NetR25_1: R25.1 R27.2 | length 161.5
  Top Layer w10: R25.1@7240,3885.2 7240,3729.56 R27.2@7245.91,3729.56
NetR28_2: R28.2 U6.9 | length 2132.7
  Top Layer w10: v1(2560,3020) R28.2@2560,3080 ; v1(4200,3680) 4200,3742.05 4214.73,3756.78 4217.26,3756.78 4220.79,3760.32 U6.9@4240,3760.32
  Layer 1 w10: v1(2560,3020) 2620,2960 2920,2960 3540,3580 3957.91,3580 4057.91,3680 v1(4200,3680)
NetR29_2: R29.2 U9.17 | length 5099.4
  Top Layer w10: v1(1720,3440) 1780,3500 R29.2@2031.5,3500 ; v1(2900,1800) 3600,1800 3900,1500 4896.65,1500 4931.09,1534.44 4931.09,1807.53 4931.62,1808.06 4931.62,1844.77 U9.17@4931.97,1845.12
  Layer 1 w10: v1(1720,3440) 1676,3396 1676,2824 2700,1800 v1(2900,1800)
NetR36_2: R36.2 U7.1 | length 247.1
  Top Layer w10: U7.1@3001.61,2303.5 3001.61,2341.61 3020,2360 3113.82,2360 3143.07,2330.75 3146.93,2330.75 3173.11,2304.57 R36.2@3180,2304.57
NetR38_2: R38.2 U7.4 | length 188.9
  Top Layer w10: U7.4@3078.39,2303.5 3078.39,2284.8 3082.24,2280.94 3099.06,2280.94 3180.39,2199.61 3189.25,2199.61 3200,2188.86 R38.2@3200,2180
NetR40_2: R40.2 SW3.4 SW3.5 SW3.6 SW3.7 | length 564.9
  Top Layer w10: SW3.4@3855.36,3217.99 SW3.6@3855.36,3142.01 SW3.7@4142.76,3142.01 SW3.5@4142.76,3217.99 4177.44,3217.99 4216.46,3257.01 4216.46,3261.38 4235.08,3280 R40.2@4240,3280
NetR41_2: R41.2 SW4.4 SW4.5 SW4.6 SW4.7 | length 1001.7
  Top Layer w10: SW4.6@4436.3,3131.54 4447.05,3120.79 4456.05,3120.79 4456.84,3120 4548.55,3120 4633.31,3204.76 4633.31,3260.6 4652.71,3280 ; R41.2@4580,3360 4580,3355.08 4561.38,3336.46 4532,3336.46 4450.99,3255.44 4450.99,3218.27 4440.24,3207.52 SW4.4@4436.3,3207.52 4444.92,3198.9 4511.3,3198.9 4592.4,3280 4652.71,3280 ; SW4.7@4723.7,3131.54 SW4.5@4723.7,3207.52 4723.7,3240.76 4684.46,3280 4652.71,3280
NetR45_2: R45.2 SW5.3 | length 527.7
  Top Layer w10: SW5.3@1231.42,1036.5 1231.42,1110.21 1396.02,1274.81 1396.02,1311.65 1472.24,1387.87 1472.24,1449.25 R45.2@1482.99,1460
NetR48_1: R48.1 U9.16 | length 238.3
  Top Layer w10: U9.16@4859.13,1917.95 4859.13,1680.87 R48.1@4860,1680
NetR50_1: R50.1 U10.2 | length 1338.1
  Top Layer w10: R50.1@1859.37,1460 2059.6,1460 2096.17,1496.57 2340.32,1496.57 2346.58,1490.31 2590.72,1490.31 2596.98,1496.57 3008.02,1496.57 3064.6,1440 U10.2@3153.7,1440
NetR51_2: R51.2 U9.7 | length 314.3
  Top Layer w10: v1(4680,2120) 4704.88,2095.12 U9.7@4859.13,2095.12
  Bottom Layer w10: R51.2@4580,2060 4620,2060 v1(4680,2120)
NetR52_2: R52.2 U9.8 | length 306.7
  Top Layer w10: v1(4640,2120) 4684.57,2075.43 U9.8@4859.13,2075.43
  Bottom Layer w10: R52.2@4580,2140 4580,2138.62 4598.62,2120 v1(4640,2120)
NetR53_2: R53.2 U9.14 | length 1024.2
  Top Layer w10: R53.2@4060,1781.26 4064.92,1781.26 4206.18,1640 4500,1640 4660,1800 4660,1860 4749.41,1949.41 4759.57,1949.41 4767.48,1957.32 U9.14@4859.13,1957.32
NetR54_1: R54.1 U9.38 | length 559.4
  Top Layer w10: U9.38@5300.08,2016.38 5596.38,2016.38 5740,2160 R54.1@5740,2220
NetR55_2: R55.2 U9.6 | length 733.1
  Top Layer w10: R55.2@4422.74,1720 4538.99,1720 4558.99,1740 v1(4560,1740) ; v1(4720,2120) 4724.87,2120 4730.07,2114.8 U9.6@4859.13,2114.8
  Layer 2 w10: v1(4560,1740) 4720,1900 v1(4720,2120)
NetR56_1: R56.1 R59.1 U11.1 | length 230.3
  Top Layer w10: R59.1@4680,2738.74 4683.94,2734.8 U11.1@4809.76,2734.8 4809.76,2831.57 R56.1@4811.25,2833.06
NetR58_1: R58.1 SW4.3 U10.4 | length 4107.6
  Top Layer w10: R58.1@2298.74,1460 v1(2400,1460) ; v1(2940,1460) 3015,1460 3135,1340 U10.4@3153.7,1340 ; v1(4420,3004) 4420.56,3003.44 4512.17,3003.44 4668.58,3159.86 SW4.3@4668.58,3238.43
  Layer 1 w10: v1(2400,1460) v1(2940,1460) 3160,1680 3660,1680 3740,1760 3740,2940 3804,3004 v1(4420,3004)
NetR59_2: R59.2 U9.61 U11.3 | length 768.9
  Top Layer w10: U11.3@4809.76,2660 R59.2@4680,2660 4684.92,2660 4703.54,2641.38 4703.54,2456.56 4925.38,2234.72 4977.93,2234.72 4990.68,2247.48 4990.68,2285.72 U9.61@4991.02,2286.06
NetR61_1: R61.1 U10.6 | length 506.1
  Top Layer w10: R61.1@2738.74,1460 2834.21,1460 3054.21,1240 U10.6@3153.7,1240
NetSW3_1: SW3.1 SW4.2 | length 939.2
  Top Layer w10: SW3.1@3910.47,3248.9 3910.47,3233.15 3919.25,3224.37 3995.66,3224.37 4010.66,3209.37 4105.56,3209.37 4112.24,3216.05 4112.24,3237.06 4188.81,3313.62 4306.38,3313.62 4406.61,3213.39 4406.61,3163.14 4412.47,3157.28 4462.72,3157.28 4480,3140 4540,3140 4601.72,3201.72 4601.72,3230.62 SW4.2@4609.53,3238.43
NetSW4_1: SW4.1 U6.1 U6.5 | length 804.9
  Top Layer w10: U6.5@4401.48,3819.37 4420.69,3819.37 4424.22,3815.84 4426.76,3815.84 4436.22,3806.38 4436.22,3753.63 4424.37,3741.78 4402.64,3741.78 U6.1@4401.48,3740.63 4401.48,3629.47 4613.62,3417.33 4613.62,3307.31 4601.31,3295 4586.18,3295 4529.61,3238.43 SW4.1@4491.42,3238.43
NetU1_24: U1.24
NetU9_62: U9.62 U11.4 | length 401
  Top Layer w10: U11.4@4920,2660 4929.84,2660 4936.65,2653.19 4936.65,2643.35 4971.34,2608.66 U9.62@4971.34,2286.06
NetU9_63: U9.63 U11.5 | length 456.7
  Top Layer w10: U11.5@4920,2697.4 4910.16,2697.4 4895.78,2683.02 4895.42,2683.02 4888.35,2675.95 4888.35,2632.06 4951.65,2568.75 U9.63@4951.65,2286.06
VCORE: C40.2 C41.2 C42.2 C48.1 C52.2 U9.12 U9.37 U9.49 U9.64 | length 3005.8
  Top Layer w10: v1(4600,1980) 4640.79,2020.79 4640.79,2029.73 4646.64,2035.59 4697.87,2035.59 4728.54,2004.92 C40.2@4728.54,2000 ; C40.2@4728.54,2004.33 4744.21,2020 4760,2020 4783.31,1996.69 U9.12@4859.13,1996.69 ; v1(4900,2480) C42.2@4900,2400 4900,2353.46 4931.97,2321.5 U9.64@4931.97,2286.06 ; U9.49@5227.24,2286.06 5227.24,2321.5 5290.08,2384.33 5296.69,2384.33 C52.2@5312.36,2400 5360,2400 ; v1(5280,2320) 5379.84,2419.84 C48.1@5420,2419.84 ; U9.37@5300.08,1996.69 5443.31,1996.69 5460,1980 C41.2@5460,1940 ; C41.2@5460,1920 C41.2@5460,1940 ; v1(5540,1980) 5500,1980 5473.74,1953.74 5473.74,1940.59 5473.15,1940 C41.2@5460,1940
  Layer 1 w10: v1(4600,1980) 4600,2420 4660,2480 v1(4900,2480)
  Layer 2 w10: v1(4900,2480) 5000,2480 5160,2320 v1(5280,2320) 5460,2320 5540,2240 v1(5540,1980)
pads on no net: IC2.2 IC3.2 IC3.3 IC3.4 IC3.8 IC3.9 IC3.10 IC3.11 IC3.49 IC3.50 IC3.51 IC3.52 J9.A8 J9.B8 P10.4 P10.6 P10.8 SW3. SW4. SW5.2 SW6.1 SW6.4 SW7.1 SW7.4 SW8.1 SW8.4 U1.5 U1.11 U1.17 U4.10 U4.11 U5.6 U5.10 U9.19 U9.22 U9.23 U9.24 U9.26 U9.27 U9.28 U9.32 U9.33 U9.34 U9.36 U9.41 U9.44 U9.45 U9.46 U9.48 U9.52 U9.53 U9.57 U9.58 U9.60 U10.8 U10.10 U10.12 Y2.2 Y2.4
copper on no net:
  other v3: 4720,1135 6535,3295 1435,3620 4700,3820

## Polygon pours and split planes (outlines as drawn)
+3V3 on Layer 2 "+3V3_L03_P001" (solid, pour order 1): 1090,4909.06 1090,581.95 7579.7,581.95 7560.42,4871
GND on Layer 1 "GND_L02_P000" (solid, pour order 0): 1100,4890 1100,584.58 7579.73,575.46 7560.34,4890

## Silkscreen, mask and mechanical layers (free items; w line width, h text height)
Top Overlay:
  drawing of 300 lines, arcs and shapes, not listed
  text "12V" at 4635,4805 h40 r90
  text "12V" at 5020,4800 h40 r90
  text "5V" at 5795,4800 h40 r90
  text "GND" at 4500,4795 h40 r90
  text "GND" at 4890,4795 h40 r90
  text "12V" at 5415,4795 h40 r90
  text "GND" at 5665,4795 h40 r90
  text "3V3" at 6185,4795 h40 r90
  text "CH1" at 7230,4795 h40 r90
  text "GND" at 5285,4790 h40 r90
  text "GND" at 6055,4790 h40 r90
  text "CH1" at 6740,4790 h40 r90
  text "5V" at 7015,4790 h40 r90
  text "CH2" at 7125,4790 h40 r90
  text "5V" at 6525,4785 h40 r90
  text "CH2" at 6635,4785 h40 r90
  text "GND" at 6910,4785 h40 r90
  text "GND" at 6420,4780 h40 r90
  text "3V3" at 1105,4710 h40
  text "3V3" at 2605,4705 h40
  text "3V3" at 3000,4705 h40
  text "3V3" at 3490,4705 h40
  text "3V3" at 1655,4700 h40
  text "3V3" at 2040,4700 h40
  text "GND" at 3740,4700 h40
  text "GND" at 4145,4695 h40
  text "I2C SCK" at 1105,4610 h40
  text "UART5 RX" at 2605,4605 h40
  text "NRST" at 3000,4605 h40
  text "RX" at 3490,4605 h40
  text "I2C SDA" at 1655,4600 h40
  text "I2C SCK" at 2040,4600 h40
  text "IN2" at 3740,4600 h40
  text "IN4" at 4145,4595 h40
  text "SPI CS" at 1105,4515 h40
  text "UART5 TX" at 2605,4510 h40
  text "Boot0" at 3000,4510 h40
  text "PB1" at 3490,4510 h40
  text "I2C SDA" at 2040,4505 h40
  text "IN1" at 3740,4505 h40
  text "SPI MISO" at 1655,4500 h40
  text "IN3" at 4145,4500 h40
  text "SPI SCK" at 1105,4410 h40
  text "AIN 17" at 2605,4405 h40
  text "TX" at 3000,4405 h40
  text "PB0" at 3490,4405 h40
  text "SPI MOSI" at 1655,4400 h40
  text "AIN 16" at 2040,4400 h40
  text "ENA" at 3740,4400 h40
  text "ENB" at 4145,4395 h40
  text "GND" at 1105,4315 h40
  text "GND" at 2605,4310 h40
  text "GND" at 3000,4310 h40
  text "GND" at 3490,4310 h40
  text "GND" at 2040,4305 h40
  text "3V3" at 3740,4305 h40
  text "GND" at 1655,4300 h40
  text "3V3" at 4145,4300 h40
  text "Motor 2" at 6870,4300 h60
  text "Motor 1" at 6380,4290 h60
  text "PWR" at 4980,4080 h90
  text "STM32" at 1150,4040 h90
  text "WIFI" at 5860,2825 h90
  text "PWR" at 3365,1805 h90
  text "Eckstein" at 6670,920 h100
  text "Hoertnagl" at 6670,778.32 h100
  text "MCI" at 5930,730 h250
  text "Goetz" at 6670,640 h100
Mechanical 1:
  lines w10: 1053.15,540.94 7600,540.94 7600,4940.94 1053.15,4940.94 1053.15,540.94

## Text inside footprints (layer, text, board x,y; h text height)
U5: Top 3D Body "*" at 1934,2339.5 h0 r90